# Altium PCB ESC.PcbDoc
Units mm, origin at the board's own origin, x right, y up, seen from the top; angles counter-clockwise.
Board outline 205.99 x 101.85 mm, 2 copper layers (Top Layer, Bottom Layer); 24 components, 47 nets, 151 pads, 180 vias.
Unrouted connection lines stored in the file: 83.
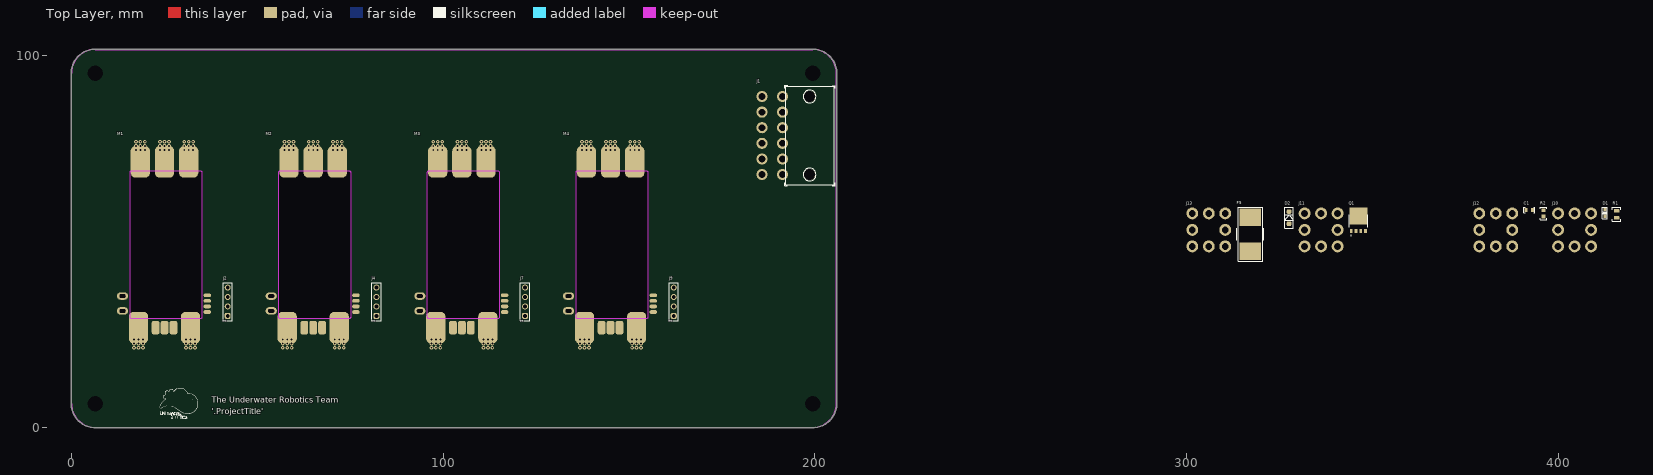
[diagram p0: Top Layer view]
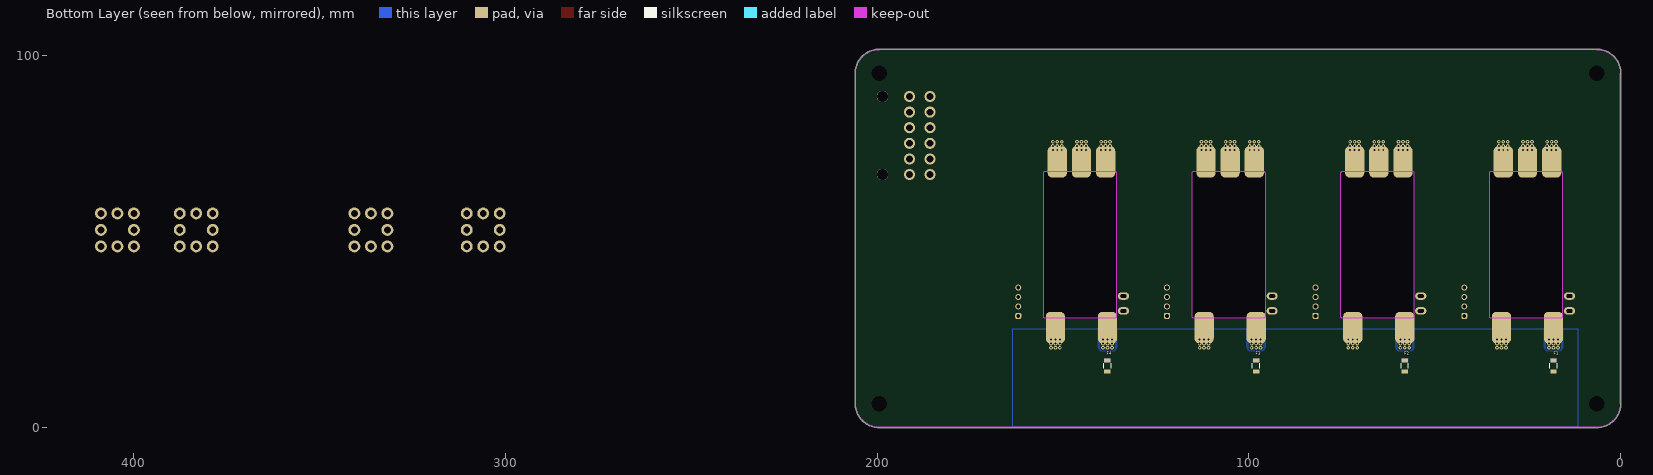
[diagram p1: Bottom Layer view, seen from below]

## Layer stack, top to bottom
Top Solder: solder mask 0.0102, Solder Resist, Dk 3.5
Top Layer: signal copper 0.0356
Dielectric 1: dielectric 0.32, FR-4, Dk 4.8
Bottom Layer: signal copper 0.0356
Bottom Solder: solder mask 0.0102, Solder Resist, Dk 3.5

## Board outline
6.35,-0.127 cw(c6.35,6.35) -0.127,6.35 -0.127,95.25 cw(c6.35,95.25) 6.35,101.727 199.39,101.727 cw(c199.39,95.25) 205.867,95.25 205.867,6.35 cw(c199.39,6.35) 199.39,-0.127

## Design rules (kind name [scope] priority, off if disabled: settings)
Clearance [All] p1: gap=0.254 ignorepadtopadclearanceinfootprint=FALSE except(0: Arc-Hole Track-Hole SMDPad-Hole THPad-Hole Via-Hole Fill-Hole Poly-Hole Region-Hole Text-Hole)
PolygonConnect PolygonConnect_2 [All vs IsNamedPolygon('NETF1_2_L02_P004') Or IsNamedPolygon('NETF2_2_L02_P001') Or IsNamedPolygon('NETF3_2_L02_P002') Or IsNamedPolygon('NETF4_2_L02_P003')] p1: thpad.connectstyle=Direct thpad.reliefconductorwidth=0.254 thpad.reliefentries=4 thpad.polygonreliefangle="90 Angle" thpad.airgapwidth=0.254 smdpad.connectstyle=Direct smdpad.reliefconductorwidth=0.254 smdpad.reliefentries=4 smdpad.polygonreliefangle="90 Angle" smdpad.airgapwidth=0.254 via.connectstyle=Relief via.reliefconductorwidth=0.254 via.reliefentries=4 via.polygonreliefangle="90 Angle" via.airgapwidth=0.254
PolygonConnect PolygonConnect_1 [All] p2: thpad.connectstyle=Direct thpad.reliefconductorwidth=0.254 thpad.reliefentries=4 thpad.polygonreliefangle="90 Angle" thpad.airgapwidth=0.254 smdpad.connectstyle=Direct smdpad.reliefconductorwidth=0.254 smdpad.reliefentries=4 smdpad.polygonreliefangle="90 Angle" smdpad.airgapwidth=0.254 via.connectstyle=Relief via.reliefconductorwidth=0.254 via.reliefentries=4 via.polygonreliefangle="90 Angle" via.airgapwidth=0.254
PolygonConnect "Direct Connect" [All vs IsNamedPolygon('NONET_L02_P000')] p3: thpad.connectstyle=Direct thpad.reliefconductorwidth=0.254 thpad.reliefentries=4 thpad.polygonreliefangle="90 Angle" thpad.airgapwidth=0.254 smdpad.connectstyle=Direct smdpad.reliefconductorwidth=0.254 smdpad.reliefentries=4 smdpad.polygonreliefangle="90 Angle" smdpad.airgapwidth=0.254 via.connectstyle=Relief via.reliefconductorwidth=0.254 via.reliefentries=4 via.polygonreliefangle="90 Angle" via.airgapwidth=0.254
PolygonConnect [All] p4: connectstyle=Relief reliefconductorwidth=0.254 reliefentries=4 polygonreliefangle="90 Angle" airgapwidth=0.254
RoutingVias [All] p1: holewidth=0.711 width=1.27 viastyle="Through Hole" minholewidth=0.711 minwidth=1.27 maxholewidth=0.711 maxwidth=1.27
SolderMaskExpansion [All] p1: expansion=0.102 istentingtop=FALSE
Width [All] p1: maxlimit=10 minlimit=2539.975 preferedwidth=1 toplayer_minwidth=0 bottomlayer_minwidth=0
30 further rules are at their usual default settings.

## Components (designator, comment, footprint, x,y, rotation, side; value= is the part's Value field where it differs from the comment)
C1 "1uF Ceramic 16V" CAPACITOR_0603 392.176,58.42 r0 top value=1uF
D1 "IN-S63AT5G" LED_0603 412.496,57.658 r90 top
D2 "Zener_Diode_10V_410mW" SOD-123 327.533,56.388 r90 top
F1 "0685H9150-01" 0501Series_LTF 18,16.5 r90 bottom
F2 "0685H9150-01" 0501Series_LTF 58,16.5 r90 bottom
F3 "0685H9150-01" 0501Series_LTF 98,16.5 r90 bottom
F4 "0685H9150-01" 0501Series_LTF 138,16.5 r90 bottom
F5 "1245HC60-RTR" "2-SMD Fuse" 317.119,51.943 r90 top
J1 "12 POS R/A" "CONN_MOLEX_MINIFIT JR_12 POS_R/A" 192.151,78.486 r90 top
J2 "CONN HEADER VERT 4POS 2.54MM" HEADER_4PIN_2.54MM 42,29.96 r90 top
J4 "CONN HEADER VERT 4POS 2.54MM" HEADER_4PIN_2.54MM 82,29.96 r90 top
J7 "CONN HEADER VERT 4POS 2.54MM" HEADER_4PIN_2.54MM 122,29.96 r90 top
J9 "CONN HEADER VERT 4POS 2.54MM" HEADER_4PIN_2.54MM 162,29.96 r90 top
J10 "Redcube M4 Term 85A" "Redcube M4 Term 85A" 404.368,53.086 r0 top
J11 "Redcube M4 Term 85A" "Redcube M4 Term 85A" 336.169,53.086 r0 top
J12 "Redcube M4 Term 85A" "Redcube M4 Term 85A" 383.159,53.086 r0 top
J13 "Redcube M4 Term 85A" "Redcube M4 Term 85A" 305.943,53.086 r0 top
M1 "APD 80F3[X]" "APD 80F3[X]" 25,26.9 r90 top
M2 "APD 80F3[X]" "APD 80F3[X]" 65,26.9 r90 top
M3 "APD 80F3[X]" "APD 80F3[X]" 105,26.9 r90 top
M4 "APD 80F3[X]" "APD 80F3[X]" 145,26.9 r90 top
Q1 "MOSFET P-CH 30V 45A LFPAK56" TRANS_PSMN5R5-60YS,115 346.202,55.499 r90 top
R1 "4.7k Ohm 5% 1/8W" RESISTOR_0805 415.671,57.277 r90 top
R2 "100k Ohm 5% 1/8W" RESISTOR_0603 395.986,57.531 r90 top

## Footprints (in the part's own frame and the unit in brackets; to place one, negate y for a bottom-side part, rotate by r counter-clockwise, add the part's x,y. Pads: shape width x height; smd on the part's side, far side on the other; paste and mask are expansions set on the pad)
"2-SMD Fuse" [mm]
  rect 4.7x5.8 smd paste+0 mask+0: 1(-4.55,0) 2(4.55,0)
  silkscreen extent -7.24,-3.68 7.24,3.68
0501Series_LTF [mil]
  rect 42x68 smd paste+0 mask+0: 1(-59.5,0) 2(59.5,0)
  silkscreen extent -26,-39 26,39, body extent -66,-34 66,34, height 23
"APD 80F3[X]" [mm] "Advanced Power Drives 80F3[X] ESC"
  rrect50% 8.5x5.2 all layers, no hole: 1(-0.1,7) 2(-0.1,-7) 3(44.5,6.5) 4(44.5,0) 5(44.5,-6.5)
  oval 2x3 hole 1.6 slot 1 at 0 deg: 6(4.4,11.3) 7(8.4,11.3)
  rrect50% 3.6x2.1 smd: 8(-0.1,2.4) 9(-0.1,0) 10(-0.1,-2.4)
  oval 1x2 smd: 11(4.1,-11.5) 12(5.6,-11.5) 13(7.1,-11.5) 14(8.6,-11.5)
  Keep-Out Layer board cut-out: 2.4,8.9 2.4,-9.7 2.438,-9.891 2.546,-10.054 2.709,-10.162 2.9,-10.2 2.9,-10.2 41.5,-10.2 41.691,-10.162 41.854,-10.054 41.962,-9.891 42,-9.7 42,-9.7 42,8.9 41.962,9.091 41.854,9.254 41.691,9.362 41.5,9.4 41.5,9.4 2.9,9.4 2.709,9.362 2.546,9.254 2.438,9.091 2.4,8.9
  body extent -3.1,-11 47.4,11, height 4.21
CAPACITOR_0603 [mil] "CAPACITOR 0603"
  rect 30x40 smd: 1(-35,0) 2(35,0)
  silkscreen extent -60,-30 60,30, body extent -31,-16 32,16, height 31
"CONN_MOLEX_MINIFIT JR_12 POS_R/A" [mm] "Molex Minifit Jr 5569 12 Pos R/A"
  round 3 hole 1.801: 1(10.5,0.9) 2(6.3,0.9) 3(2.1,0.9) 4(-2.1,0.9) 7(10.5,6.4) 8(6.3,6.4) 9(2.1,6.4) 10(-2.1,6.4)
  round 3 hole 1.8: 5(-6.3,0.9) 6(-10.5,0.9) 11(-6.3,6.4) 12(-10.5,6.4)
  round 3 hole 3 unplated mask+0: ""(-10.5,-6.4) ""(10.5,-6.4)
  silkscreen extent -13.48,-13.27 13.51,0.33, body extent -13.27,-13.08 13.53,6.85, height 11.01
HEADER_4PIN_2.54MM [mm]
  rrect50% 1.62x1.62 hole 1.02: 1(0,0)
  round 1.62 hole 1.02: 2(2.54,0) 3(5.08,0) 4(7.62,0)
  silkscreen extent -1.27,-1.25 8.89,1.25, body extent -1.27,-1.27 8.89,1.27, height 10.48
LED_0603 [mil] "LED 0603"
  rect 32x32 smd: 1(-35,0) 2(35,0)
  silkscreen extent -60,-25 60,25, body extent -31,-16 32,16, height 28
"Redcube M4 Term 85A" [mm]
  round 3.2 hole 1.85: 1(-4.435,-4.435) 1(-4.435,0) 1(-4.435,4.435) 1(0,-4.435) 1(0,4.435) 1(4.435,-4.435) 1(4.435,0) 1(4.435,4.435)
  round 3.2 hole 4.1 unplated: 8(0,0)
  body extent -5,-5 5,5, height 3
RESISTOR_0603 [mil] "Resistor 0603"
  rect 40x45 smd: 1(-33.5,0) 2(33.5,0)
  silkscreen extent -65,-35 65,35, body extent -31,-16 32,16, height 16
RESISTOR_0805 [mm]
  rrect25% 1x1.42 smd: 1(-0.935,0) 2(0.935,0)
  silkscreen extent -1.91,-1.14 1.91,1.14
SOD-123 [mm] "Schottky Diode SOD-123"
  rrect50% 1.2x1.22 smd: 1(-1.635,0) 2(1.635,0)
  silkscreen extent -2.79,-1.14 2.79,1.14, body extent -1.95,-0.9 1.95,0.9, height 1.18
TRANS_PSMN5R5-60YS,115 [mm]
  rect 1.15x0.7 smd paste-2 mask+0: 1(-2.725,1.905) 2(-2.725,0.635) 3(-2.725,-0.635) 4(-2.725,-1.905)
  rect 4.6x4.8 smd paste-1 mask+0: 5(1.3,0)
  silkscreen extent -4,-2.45 1.65,2.45, body extent -3,-2.45 3,2.45, height 1.2

## Part data
C1: library part CAPACITOR_1uF_0603, "Cap 1uF 16V +/-10% / Ceramic 0603", Supplier Part Number 1=399-7847-1-ND, Tolerance="+/- 10%", Voltage=16V, Made By="Flip B", Supplier 1=Digi-Key
D1: library part LED_Green_0603_3V, "LED Green Vf= 3V If = 0.005A / IN-S63AT5G", Color=Green, Forward Current=5mA, Forward Voltage=3V, Package=0603, Supplier Part Number 1=1830-1062-1-ND, ComponentLink1Description=Datasheet, ComponentLink1URL=https://www.we-online.de/katalog/datasheet/150060GS75000.pdf, Made By="Robert Pafford", Supplier 1=Digi-Key
D2: "Zener Diode", Package=SOD-123, Power=410mW, Supplier Part Number 1=3757-BZT52-C10_R1_00001CT-ND, Voltage - Zener=10V, ComponentLink1Description=Datasheet, ComponentLink1URL=https://www.panjit.com.tw/upload/datasheet/BZT52-C2V4_SERIES.pdf, Made By="Nathan A", Supplier 1=Digi-Key
F1 F2 F3 F4: library part "Bel Fuse 15A", "Bel Fuse", Breaking Capacity=150A, Current Rating=15, Package=1206, Voltage Rating=32V, Created By="Nathan Ayer", Manufacturer_Part_Number=0685H9150-01, Mfr_Name="Bel Fuse", Response Time="Fast Blow"
F5: library part "Eaton 60A Fuse", "Eaton", Breaking Capacity=1kA, Current Rating=60A, Package=2-SMD, Voltage Rating=80V, ComponentLink1Description=DigiKey, ComponentLink1URL=https://www.digikey.com/en/products/detail/eaton-electronics-division/1245HC60-RTR/13913536, Created By="Nathan Ayer", Manufacturer_Part_Number=1245HC60-RTR, Mfr_Name=Eaton, Response Time="Fast Blow"
J1: library part "CONN_MOLEX_MINIFIT JR_12POS_R/A", "Molex Minifit Jr. 5569  / 12 Pos R/A Natural", Color=Natural, Current Per Pin=13A, Manufacturer=Molex, Supplier Part Number 1=WM21356-ND, ComponentLink1Description=Datasheet, ComponentLink1URL=https://www.molex.com/pdm_docs/ps/PS-5556-001.pdf, Configuration="Right Angle", Created By="Flip B", Number of Positions=12, Pitch=4.2mm, Series="Minifit Jr 5569", Supplier 1=Digi-Key
J2 J4 J7 J9: library part HEADER_4PIN_2.54MM, Supplier Part Number 1=S1012E-04-ND, Made By="Robert Pafford", Supplier 1=Digi-Key
J10 J11 J12 J13: Current Rating="85 A", Created By="Nahtan Ayer", Screw Size=M4
M1 M2 M3 M4: "Advanced Power Drives 80F3[X] ESC", Manufacturer="Advanced Power Drives", Max Current="80A Continuous", Voltage=15-35V, ComponentLink1Description="General Info", ComponentLink1URL=https://powerdrives.net/80f3, ComponentLink2Description="Data Sheet", ComponentLink2URL=https://docs.powerdrives.net/products/f-series-esc/overview, Created By="Nathan Ayer"
Q1: library part BUK6Y19-30PX, "P-Channel 30 V 45A (Ta) 66W (Ta) Surface Mount LFPAK56, Power-SO8"
R1: library part RESISTOR_4.7K_0805, "RES 4.7k OHM 5% 1/8W 0805", Digikey Part Numer=CR0603-JW-104ELFTR-ND, Tolerance="+/- 5%", Value  (Ohms)=4.7K, ComponentLink1Description=Datasheet, Made By="Robert Pafford", Supplier=Digikey, Wattage=1/8W
R2: library part RESISTOR_100K_0603, "RES 100k OHM 5% 1/10W 0603", Digikey Part Numer=CR0603-JW-104ELFTR-ND, Supplier Part Number 1=CR0603-JW-104ELFCT-ND, Tolerance="+/- 5%", Value  (Ohms)=100K, ComponentLink1Description=Datasheet, ComponentLink1URL=https://www.bourns.com/docs/product-datasheets/CRxxxxx.pdf, Made By="Flip B", Supplier=Digikey, Supplier 1=Digi-Key, Wattage=1/10W

## Free pads (board coordinates)
  round 1.524 hole 4.191: 1(6.35,6.35) 1(6.35,95.25) 1(199.39,6.35) 1(199.39,95.25)

## Via types
v1: diameter 1/1 (per signal layer), hole 0.5, Top Layer to Bottom Layer, 180 vias

## Nets (pads, with @x,y where several pads share a name; then routed paths per layer and width w, separated by ;. In a path a pad name is that pad's centre, name@x,y a point inside that pad or via, vN(x,y) a via of type N, cw(c..) or ccw(c..) an arc to the next point about the centre after c; other vN are vias at no path point)
GND: C1.1 D1.2 J10.1 J12.1 M1.2 M2.2 M3.2 M4.2 R2.1
  other v1: 30.8,21.4 32,21.4 33.2,21.4 70.8,21.4 72,21.4 73.2,21.4 110.8,21.4 112,21.4 113.2,21.4 150.8,21.4 152,21.4 153.2,21.4 30.8,22.5 32,22.5 33.2,22.5 70.8,22.5 72,22.5 73.2,22.5 110.8,22.5 112,22.5 113.2,22.5 150.8,22.5 152,22.5 153.2,22.5 30.8,23.6 32,23.6 33.2,23.6 70.8,23.6 72,23.6 73.2,23.6 110.8,23.6 112,23.6 113.2,23.6 150.8,23.6 152,23.6 153.2,23.6
NetC1_2: C1.2 D2.1 Q1.4 R2.2
NetC2_1: M1.6
NetC2_2: M1.7
NetC3_1: M2.6
NetC3_2: M2.7
NetC4_1: M3.6
NetC4_2: M3.7
NetC5_1: M4.6
NetC5_2: M4.7
NetD1_1: D1.1 R1.2
NetF1_2: F1.2 M1.1
  other v1: 16.8,21.4 18,21.4 19.2,21.4 16.8,22.5 18,22.5 19.2,22.5 16.8,23.6 18,23.6 19.2,23.6
NetF2_2: F2.2 M2.1
  other v1: 56.8,21.4 58,21.4 59.2,21.4 56.8,22.5 58,22.5 59.2,22.5 56.8,23.6 58,23.6 59.2,23.6
NetF3_2: F3.2 M3.1
  other v1: 96.8,21.4 98,21.4 99.2,21.4 96.8,22.5 98,22.5 99.2,22.5 96.8,23.6 98,23.6 99.2,23.6
NetF4_2: F4.2 M4.1
  other v1: 136.8,21.4 138,21.4 139.2,21.4 136.8,22.5 138,22.5 139.2,22.5 136.8,23.6 138,23.6 139.2,23.6
NetF5_1: F5.1 J11.1 J13.1
NetF5_2: F5.2 Q1.5
NetJ1_1: J1.1 M1.3
  other v1: 17.3,74.6 18.5,74.6 19.7,74.6 17.3,75.7 18.5,75.7 19.7,75.7 17.3,76.8 18.5,76.8 19.7,76.8
NetJ1_2: J1.2 M1.4
  other v1: 23.8,74.6 25,74.6 26.2,74.6 23.8,75.7 25,75.7 26.2,75.7 23.8,76.8 25,76.8 26.2,76.8
NetJ1_3: J1.3 M1.5
  other v1: 30.3,74.6 31.5,74.6 32.7,74.6 30.3,75.7 31.5,75.7 32.7,75.7 30.3,76.8 31.5,76.8 32.7,76.8
NetJ1_4: J1.4 M2.3
  other v1: 57.3,74.6 58.5,74.6 59.7,74.6 57.3,75.7 58.5,75.7 59.7,75.7 57.3,76.8 58.5,76.8 59.7,76.8
NetJ1_5: J1.5 M2.4
  other v1: 63.8,74.6 65,74.6 66.2,74.6 63.8,75.7 65,75.7 66.2,75.7 63.8,76.8 65,76.8 66.2,76.8
NetJ1_6: J1.6 M2.5
  other v1: 70.3,74.6 71.5,74.6 72.7,74.6 70.3,75.7 71.5,75.7 72.7,75.7 70.3,76.8 71.5,76.8 72.7,76.8
NetJ1_7: J1.7 M3.3
  other v1: 97.3,74.6 98.5,74.6 99.7,74.6 97.3,75.7 98.5,75.7 99.7,75.7 97.3,76.8 98.5,76.8 99.7,76.8
NetJ1_8: J1.8 M3.4
  other v1: 103.8,74.6 105,74.6 106.2,74.6 103.8,75.7 105,75.7 106.2,75.7 103.8,76.8 105,76.8 106.2,76.8
NetJ1_9: J1.9 M3.5
  other v1: 110.3,74.6 111.5,74.6 112.7,74.6 110.3,75.7 111.5,75.7 112.7,75.7 110.3,76.8 111.5,76.8 112.7,76.8
NetJ1_10: J1.10 M4.3
  other v1: 137.3,74.6 138.5,74.6 139.7,74.6 137.3,75.7 138.5,75.7 139.7,75.7 137.3,76.8 138.5,76.8 139.7,76.8
NetJ1_11: J1.11 M4.4
  other v1: 143.8,74.6 145,74.6 146.2,74.6 143.8,75.7 145,75.7 146.2,75.7 143.8,76.8 145,76.8 146.2,76.8
NetJ1_12: J1.12 M4.5
  other v1: 150.3,74.6 151.5,74.6 152.7,74.6 150.3,75.7 151.5,75.7 152.7,75.7 150.3,76.8 151.5,76.8 152.7,76.8
NetJ2_1: J2.1 M1.11
NetJ2_2: J2.2 M1.12
NetJ2_3: J2.3 M1.13
NetJ2_4: J2.4 M1.14
NetJ4_1: J4.1 M2.11
NetJ4_2: J4.2 M2.12
NetJ4_3: J4.3 M2.13
NetJ4_4: J4.4 M2.14
NetJ7_1: J7.1 M3.11
NetJ7_2: J7.2 M3.12
NetJ7_3: J7.3 M3.13
NetJ7_4: J7.4 M3.14
NetJ9_1: J9.1 M4.11
NetJ9_2: J9.2 M4.12
NetJ9_3: J9.3 M4.13
NetJ9_4: J9.4 M4.14
PWM_GND: M1.10 M2.10 M3.10 M4.10
VCC: D2.2 F1.1 F2.1 F3.1 F4.1 Q1.1 Q1.2 Q1.3 R1.1
pads on no net: J1. J10.8 J11.8 J12.8 J13.8 M1.8 M1.9 M2.8 M2.9 M3.8 M3.9 M4.8 M4.9

## Polygon pours and split planes (outlines as drawn)
NetF1_2 on Bottom Layer "NETF1_2_L02_P000" (solid, pour order 0): 14.2,26.6 14.2,16.567 21.82,16.567 21.82,26.6
GND on Bottom Layer "NONET_L02_P004" (solid, shelved, pour order 4): 11.5,26.543 11.5,0 163.5,0 163.5,26.543
NetF4_2 on Bottom Layer "NETF4_2_L02_P003" (solid, pour order 3): 134.2,26.6 134.2,16.567 141.82,16.567 141.82,26.6
NetF3_2 on Bottom Layer "NETF3_2_L02_P002" (solid, pour order 2): 94.2,26.6 94.2,16.567 101.82,16.567 101.82,26.6
NetF2_2 on Bottom Layer "NETF2_2_L02_P001" (solid, pour order 1): 54.2,26.6 54.2,16.567 61.82,16.567 61.82,26.6

## Keep-outs
Keep-Out Layer:
  lines w0.254: 95.25,0 6.35,0 ; 6.35,0 cw(c6.35,6.35) 0,6.35 0,95.25 cw(c6.35,95.25) 6.35,101.6 199.39,101.6 cw(c199.39,95.25) 205.74,95.25 205.74,6.35 cw(c199.39,6.35) 199.39,0 6.35,0

## Silkscreen, mask and mechanical layers (free items; w line width, h text height)
Top Overlay:
  drawing of 19 lines, arcs and shapes, not listed
  text "The Underwater Robotics Team" at 37.719,6.604 h1.52
  text "'.ProjectTitle'" at 37.719,3.429 h1.52

## Text inside footprints (layer, text, board x,y; h text height)
J2: Top Overlay "1" at 41.492,28.182 h0.76 r90
J4: Top Overlay "1" at 81.492,28.182 h0.76 r90
J7: Top Overlay "1" at 121.492,28.182 h0.76 r90
J9: Top Overlay "1" at 161.492,28.182 h0.76 r90